# EAGLE board sensor (EAGLE 9.6.1)
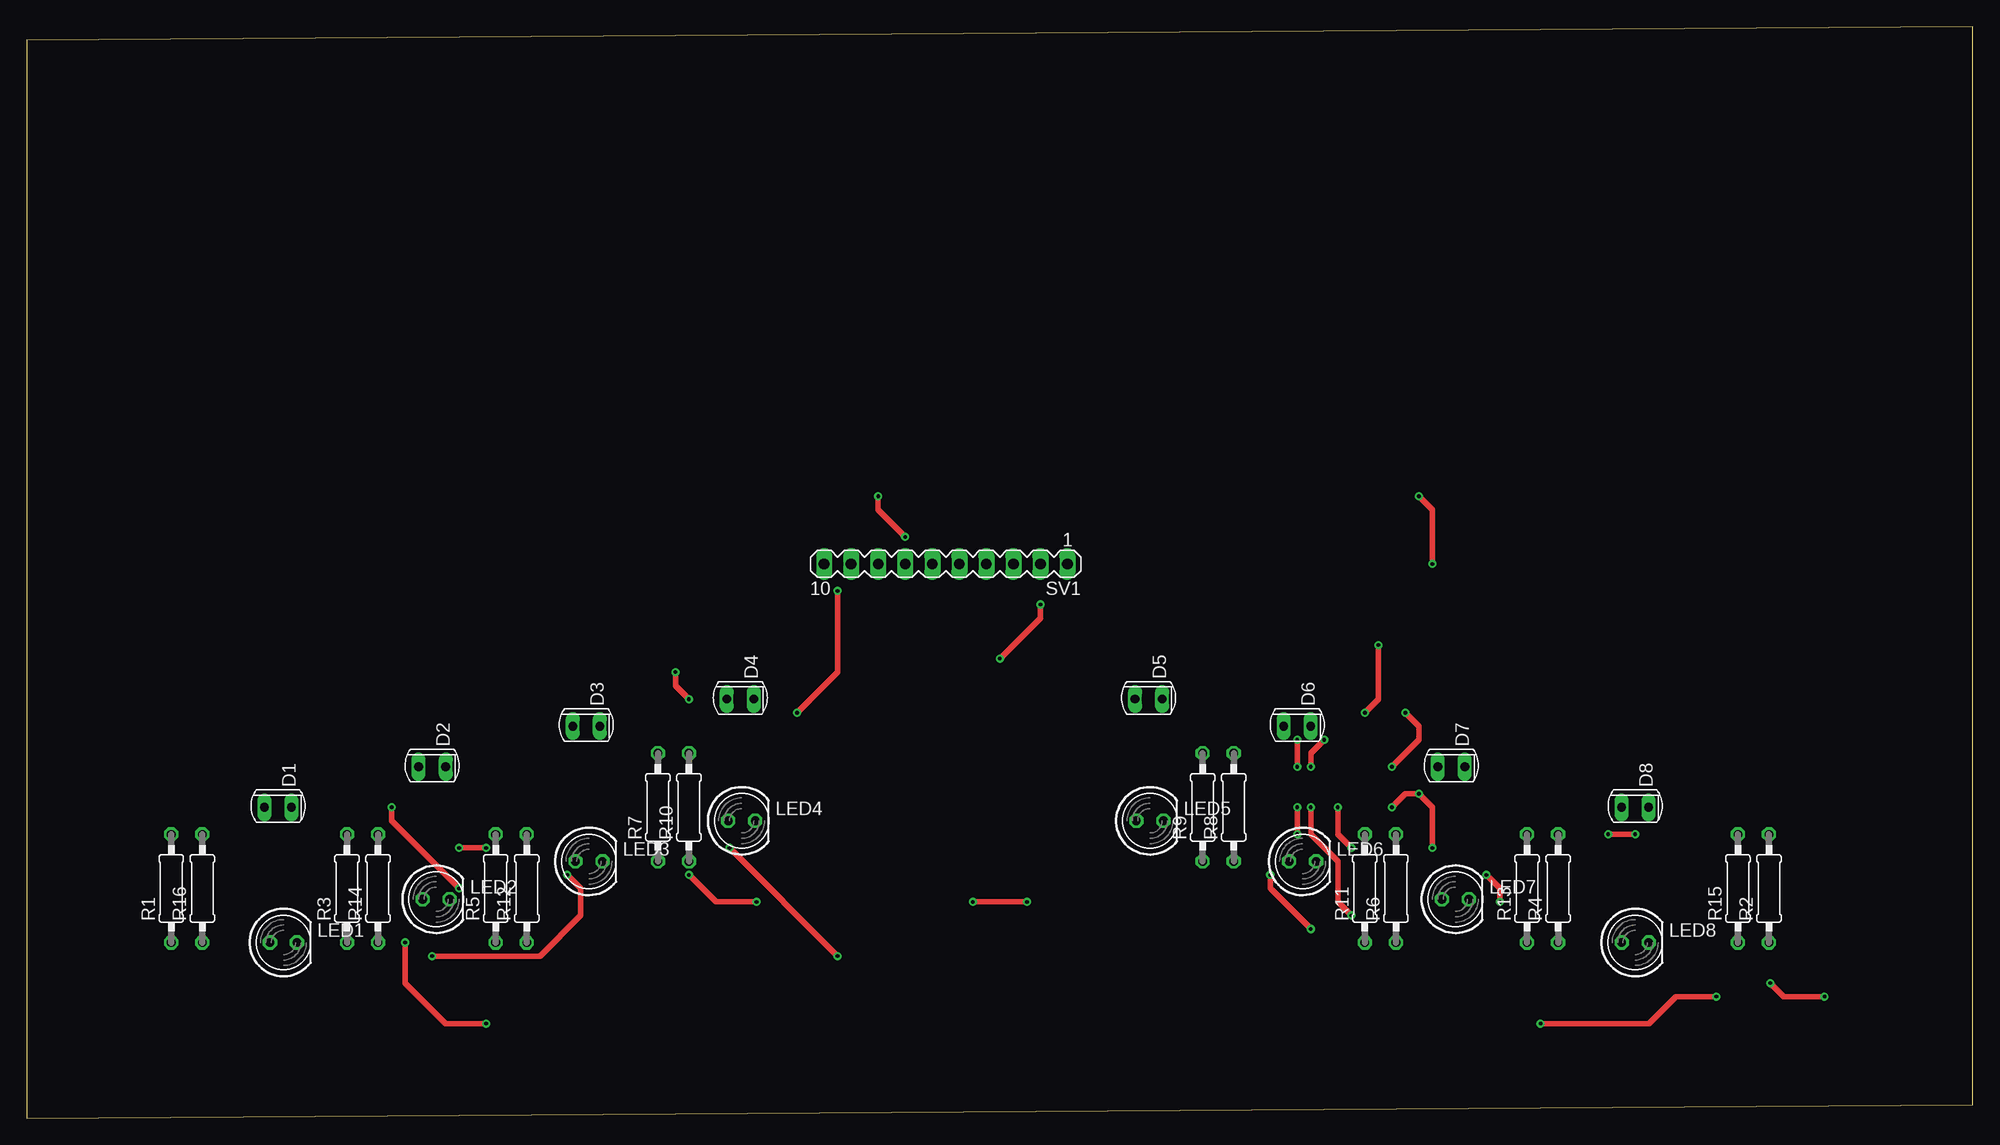
[diagram p0: board, top side]
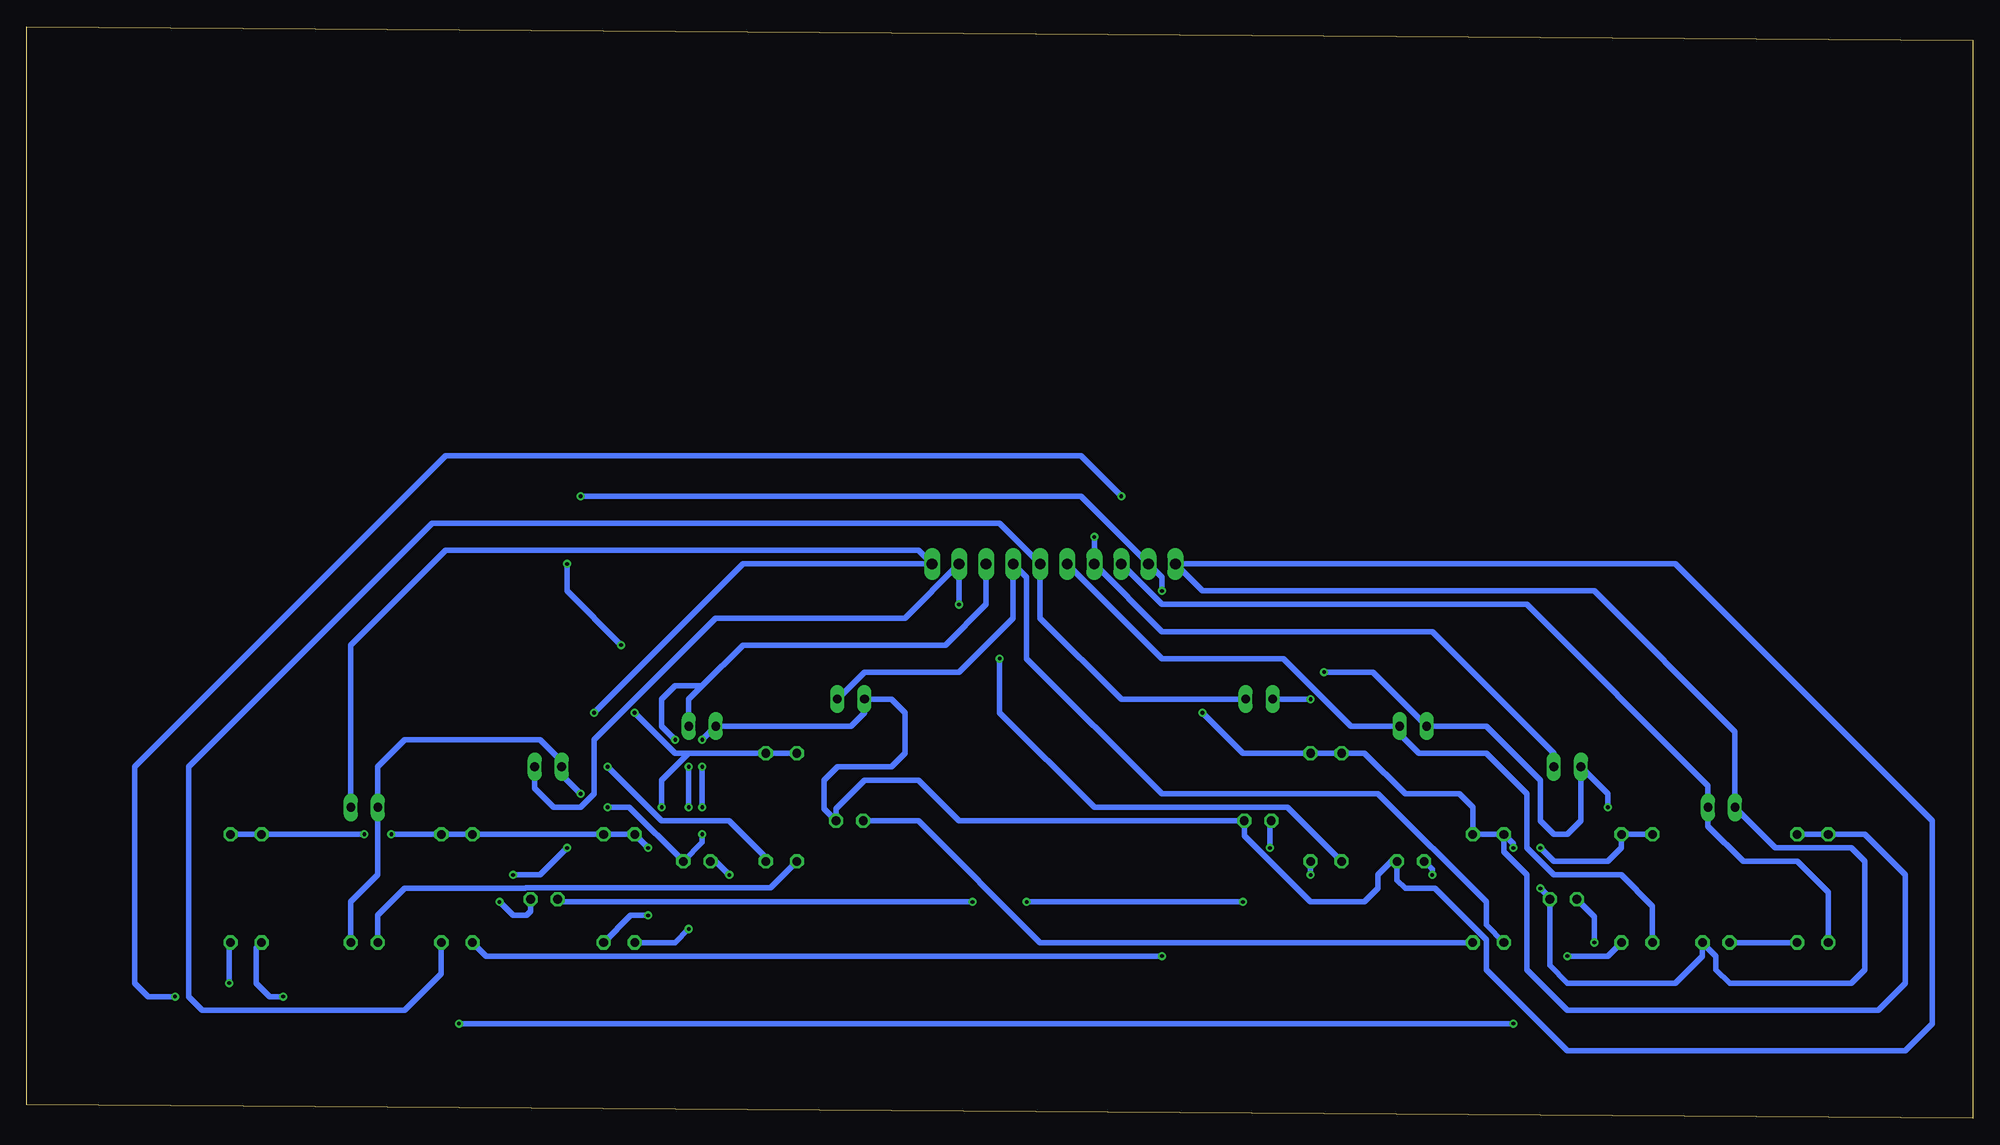
[diagram p1: board, bottom side, seen from below]

Size 182.86 x 102.54 mm. Coordinates in mm from the lower left corner, seen from the top.
Outline: 0,0 182.86,1.27 182.86,102.54 0,101.27 0,0
Copper layers (1*16): Top 0.035mm / dielectric 1.5mm / Bottom 0.035mm
Design rules "default": minimum track width 6mil, minimum drill 0.35mm, track to track 6mil, track to pad 6mil, pad to pad 6mil, via to via 6mil, smd to smd 6mil, copper to edge 40mil, drill to drill 6mil, minimum pad ring 10mil, minimum via ring 8mil, stop-mask expansion 4mil, vias tented up to drill 0mil, thermal gap 10mil

## Footprints (pad centres in the part's own frame; a part is rotated, then mirrored left to right if it is on the bottom)
SFH225 = drill 0.813 long: A 0,1.27; K 0,-1.27
LED5MM = drill 0.813 octagon: A -1.27,0; K 1.27,0
0207/10 = drill 0.813 octagon: 1 -5.08,0; 2 5.08,0
MA10-1 = drill 1.016 long: 1 -11.43,0; 2 -8.89,0; 3 -6.35,0; 4 -3.81,0; 5 -1.27,0; 6 1.27,0; 7 3.81,0; 8 6.35,0; 9 8.89,0; 10 11.43,0

## Placement (x,y rotation side)
D1  PhotoDioda  [SFH225]  23.62,29.21 90 top
D2  PhotoDioda  [SFH225]  38.1,33.02 90 top
D3  PhotoDioda  [SFH225]  52.58,36.83 90 top
D4  PhotoDioda  [SFH225]  67.06,39.37 90 top
D5  PhotoDioda  [SFH225]  105.41,39.37 90 top
D6  PhotoDioda  [SFH225]  119.38,36.83 90 top
D7  PhotoDioda  [SFH225]  133.86,33.02 90 top
D8  PhotoDioda  [SFH225]  151.13,29.21 90 top
LED1  LED putih SB  [LED5MM]  24.13,16.51 0 top
LED2  LED putih SB  [LED5MM]  38.48,20.57 0 top
LED3  LED putih SB  [LED5MM]  52.83,24.13 0 top
LED4  LED putih SB  [LED5MM]  67.18,27.94 0 top
LED5  LED putih SB  [LED5MM]  105.54,27.94 0 top
LED6  LED putih SB  [LED5MM]  119.89,24.13 0 top
LED7  LED putih SB  [LED5MM]  134.24,20.57 0 top
LED8  LED putih SB  [LED5MM]  151.13,16.51 0 top
R1  [0207/10]  13.59,21.59 90 top
R2  [0207/10]  163.7,21.59 90 top
R3  [0207/10]  30.1,21.59 90 top
R4  [0207/10]  143.89,21.59 90 top
R5  [0207/10]  44.07,21.59 90 top
R6  [0207/10]  128.65,21.59 90 top
R7  [0207/10]  59.31,29.21 90 top
R8  [0207/10]  113.41,29.21 90 top
R9  330  [0207/10]  110.49,29.21 90 top
R10  330  [0207/10]  62.23,29.21 90 top
R11  330  [0207/10]  125.73,21.59 90 top
R12  330  [0207/10]  46.99,21.59 90 top
R13  330  [0207/10]  140.97,21.59 90 top
R14  330  [0207/10]  33.02,21.59 90 top
R15  330  [0207/10]  160.78,21.59 90 top
R16  330  [0207/10]  16.51,21.59 90 top
SV1  [MA10-1]  86.36,52.07 180 top

## Library data of the parts
D1-D8 = opto-trans-siemens
LED1-LED8 = led
R1-R16 = resistor
SV1 = con-lstb

## Nets
GND: D1.A D2.A D3.A D4.A D5.A D6.A D7.A D8.A LED1.K LED2.K LED3.K LED4.K LED5.K LED6.K LED7.K LED8.K SV1.10
N$1: LED7.A R10.1
N$2: D7.K R7.1 SV1.2
N$3: D8.K R8.1 SV1.1
N$4: D1.K R1.1 SV1.8
N$5: D2.K R2.1 SV1.7
N$6: D3.K R3.1 SV1.6
N$7: D5.K R5.1 SV1.4
N$8: D4.K R4.1 SV1.5
N$9: D6.K R6.1 SV1.3
N$10: LED6.A R11.1
N$11: LED5.A R12.1
N$12: LED4.A R13.1
N$13: LED3.A R14.1
N$14: LED2.A R15.1
N$15: LED1.A R16.1
N$16: LED8.A R9.1
VCC: R1.2 R2.2 R3.2 R4.2 R5.2 R6.2 R7.2 R8.2 R9.2 R10.2 R11.2 R12.2 R13.2 R14.2 R15.2 R16.2 SV1.9

## Tracks (layer width: path | path; a pad name or v marks a point on that pad's centre or on a via)
GND  (via drill 0.35)
  Top 0.508: v40.64,21.59 34.29,27.94 v34.29,29.21 | v60.96,41.91 60.96,40.64 v62.23,39.37 | v128.27,29.21 129.54,30.48 v130.81,30.48 132.08,29.21 v132.08,25.4 | v137.16,22.86 138.43,21.59 v138.43,20.32 | v119.38,35.56 v119.38,33.02 | v119.38,29.21 v119.38,26.67
  Bottom 0.508: LED5.K 106.81,29.08 104.14,31.75 99.06,31.75 95.25,27.94 LED4.K 68.45,26.54 62.23,20.32 57.15,20.32 55.88,21.59 55.88,22.86 54.61,24.13 LED3.K 54.1,22.35 53.34,21.59 50.56,21.59 45.72,16.75 45.72,13.97 38.1,6.35 6.35,6.35 3.81,8.89 3.81,27.94 27.94,52.07 SV1.10 72.39,49.53 35.56,49.53 22.35,36.32 D1.A 18.54,25.4 11.43,25.4 10.16,24.13 10.16,13.97 11.43,12.7 22.86,12.7 24.13,13.97 24.13,15.24 LED1.K 25.4,15.24 27.94,12.7 38.1,12.7 39.75,14.35 LED2.K 39.75,20.7 v40.64,21.59 | LED8.K 152.4,20.32 149.86,22.86 D8.A 149.86,33.02 147.32,35.56 134.62,35.56 132.59,33.53 D7.A 132.59,32.26 v130.81,30.48 | v34.29,29.21 34.29,30.48 D2.A 36.83,27.94 38.1,26.67 39.37,26.67 40.64,27.94 40.64,31.75 45.72,36.83 D3.A 56.39,41.91 v60.96,41.91 | v62.23,39.37 D4.A | LED5.K 106.68,28.07 | v128.27,29.21 126.24,29.21 LED6.K 119.38,25.91 v119.38,26.67 | v138.43,20.32 137.16,19.05 135.89,19.05 135.51,19.43 LED7.K | v137.16,22.86 134.62,22.86 v132.08,25.4 | LED5.K 107.95,29.08 107.95,31.75 106.68,33.02 101.6,33.02 100.33,34.29 100.33,38.1 101.6,39.37 D5.A 104.14,38.1 105.41,36.83 D6.A v119.38,35.56 | v119.38,33.02 v119.38,29.21
N$1  (via drill 0.35)
  Top 0.508: v62.23,22.86 64.77,20.32 v68.58,20.32 | v88.9,20.32 v93.98,20.32
  Bottom 0.508: R10.1 v62.23,22.86 | v68.58,20.32 v88.9,20.32 | v93.98,20.32 132.72,20.32 LED7.A
N$2  (via drill 0.35)
  Top 0.508: v91.44,43.18 95.25,46.99 v95.25,48.26
  Bottom 0.508: D7.K 135.13,30.99 133.35,29.21 130.81,29.21 129.54,30.48 129.54,35.56 118.11,46.99 100.33,46.99 SV1.2 v95.25,48.26 | R7.1 64.39,29.21 82.55,29.21 91.44,38.1 v91.44,43.18
N$3  (via drill 0.35)
  Top 0.508: v129.54,38.1 130.81,36.83 130.81,35.56 v128.27,33.02
  Bottom 0.508: D8.K 152.4,44.45 143.51,53.34 99.06,53.34 SV1.1 115.57,52.07 v129.54,38.1 | v128.27,33.02 123.19,27.94 116.84,27.94 113.41,24.51 R8.1
N$4
  Bottom 0.508: R1.1 13.59,21.21 16.51,24.13 21.59,24.13 24.89,27.43 D1.K 24.89,31.24 41.91,48.26 76.2,48.26 SV1.8
N$5  (via drill 0.35)
  Top 0.508: v163.83,12.7 165.1,11.43 v168.91,11.43 | v80.01,58.42 80.01,57.15 v82.55,54.61
  Bottom 0.508: D2.K 39.37,34.29 50.8,45.72 76.2,45.72 SV1.7 v82.55,54.61 | R2.1 163.83,16.38 v163.83,12.7 | v168.91,11.43 171.45,11.43 172.72,12.7 172.72,33.02 143.51,62.23 83.82,62.23 v80.01,58.42
N$6
  Bottom 0.508: R3.1 30.1,19.94 33.02,22.86 39.37,22.86 41.91,25.4 41.91,30.48 45.72,34.29 52.07,34.29 53.85,36.07 D3.K 58.42,36.83 64.77,43.18 76.2,43.18 SV1.6
N$7
  Bottom 0.508: D5.K 104.14,41.91 95.25,41.91 90.17,46.99 SV1.4 88.9,50.8 88.9,43.18 76.2,30.48 55.88,30.48 45.72,20.32 45.72,18.16 R5.1
N$8
  Bottom 0.508: D4.K 80.01,39.37 87.63,46.99 SV1.5 91.44,55.88 144.78,55.88 167.64,33.02 167.64,11.43 166.37,10.16 147.32,10.16 143.89,13.59 R4.1
N$9  (via drill 0.35)
  Top 0.508: v124.46,19.05 123.19,20.32 123.19,24.13 120.65,26.67 v120.65,29.21 | v120.65,33.02 120.65,34.29 v121.92,35.56
  Bottom 0.508: SV1.3 92.71,48.26 96.52,44.45 115.57,44.45 119.38,40.64 | R6.1 126.11,19.05 v124.46,19.05 | v120.65,29.21 v120.65,33.02 | v121.92,35.56 123.19,36.83 123.19,39.37 121.92,40.64 119.38,40.64 | 119.38,40.64 120.65,39.37 D6.K
N$10  (via drill 0.35)
  Top 0.508: v120.65,17.78 116.84,21.59 v116.84,22.86
  Bottom 0.508: R11.1 121.92,16.51 v120.65,17.78 | v116.84,22.86 118.11,24.13 LED6.A
N$11
  Bottom 0.508: R12.1 87.63,16.51 99.06,27.94 LED5.A
N$12  (via drill 0.35)
  Top 0.508: v66.04,25.4 v76.2,15.24
  Bottom 0.508: LED4.A 66.04,27.81 v66.04,25.4 | v76.2,15.24 139.7,15.24 R13.1
N$13  (via drill 0.35)
  Top 0.508: v38.1,15.24 48.26,15.24 52.07,19.05 52.07,21.59 v50.8,22.86
  Bottom 0.508: R14.1 34.29,15.24 v38.1,15.24 | v50.8,22.86 50.8,23.37 LED3.A
N$14  (via drill 0.35)
  Top 0.508: v35.56,16.51 35.56,12.7 39.37,8.89 v43.18,8.89 | v142.24,8.89 152.4,8.89 154.94,11.43 v158.75,11.43
  Bottom 0.508: LED2.A 35.56,18.92 v35.56,16.51 | v158.75,11.43 160.02,11.43 161.29,12.7 161.29,16 R15.1 | v43.18,8.89 v142.24,8.89
N$15
  Bottom 0.508: R16.1 LED1.A
N$16
  Bottom 0.508: R9.1 112.98,21.64 135.95,21.64 136,21.59 147.32,21.59 149.86,19.05 LED8.A
VCC  (via drill 0.35)
  Top 0.508: v40.64,25.4 v43.18,25.4 | v72.39,38.1 76.2,41.91 v76.2,49.53 | v151.13,26.67 v148.59,26.67 | v130.81,58.42 132.08,57.15 v132.08,52.07 | v127,44.45 127,39.37 v125.73,38.1 | v123.19,29.21 123.19,26.67 v124.46,25.4
  Bottom 0.508: R1.2 R16.2 10.16,26.67 6.35,22.86 6.35,12.7 8.89,10.16 38.1,10.16 41.91,13.97 41.91,22.86 44.07,25.02 R5.2 | R3.2 R14.2 33.02,25.4 34.29,24.13 39.37,24.13 v40.64,25.4 | R5.2 R12.2 46.99,29.21 48.26,30.48 53.34,30.48 57.15,34.29 R7.2 R10.2 68.58,34.29 v72.39,38.1 | R2.2 R15.2 v151.13,26.67 | v43.18,25.4 43.18,25.78 R5.2 | v76.2,49.53 76.2,50.8 SV1.9 83.82,58.42 v130.81,58.42 | v148.59,26.67 R4.2 R13.2 R6.2 R11.2 v124.46,25.4 | v132.08,52.07 132.08,49.53 v127,44.45 | 120.65,34.29 121.92,34.29 v125.73,38.1 | 120.65,34.29 R8.2 R9.2 | 120.65,34.29 123.19,31.75 v123.19,29.21